# Altium PCB PCB_Filter.PcbDoc
Units mm, origin at the board's own origin, x right, y up, seen from the top; angles counter-clockwise.
Board outline 73.15 x 74.3 mm, 2 copper layers (Top Layer, Bottom Layer), stack 1.1 mm thick; 29 components, 36 nets, 113 pads, 3 vias.
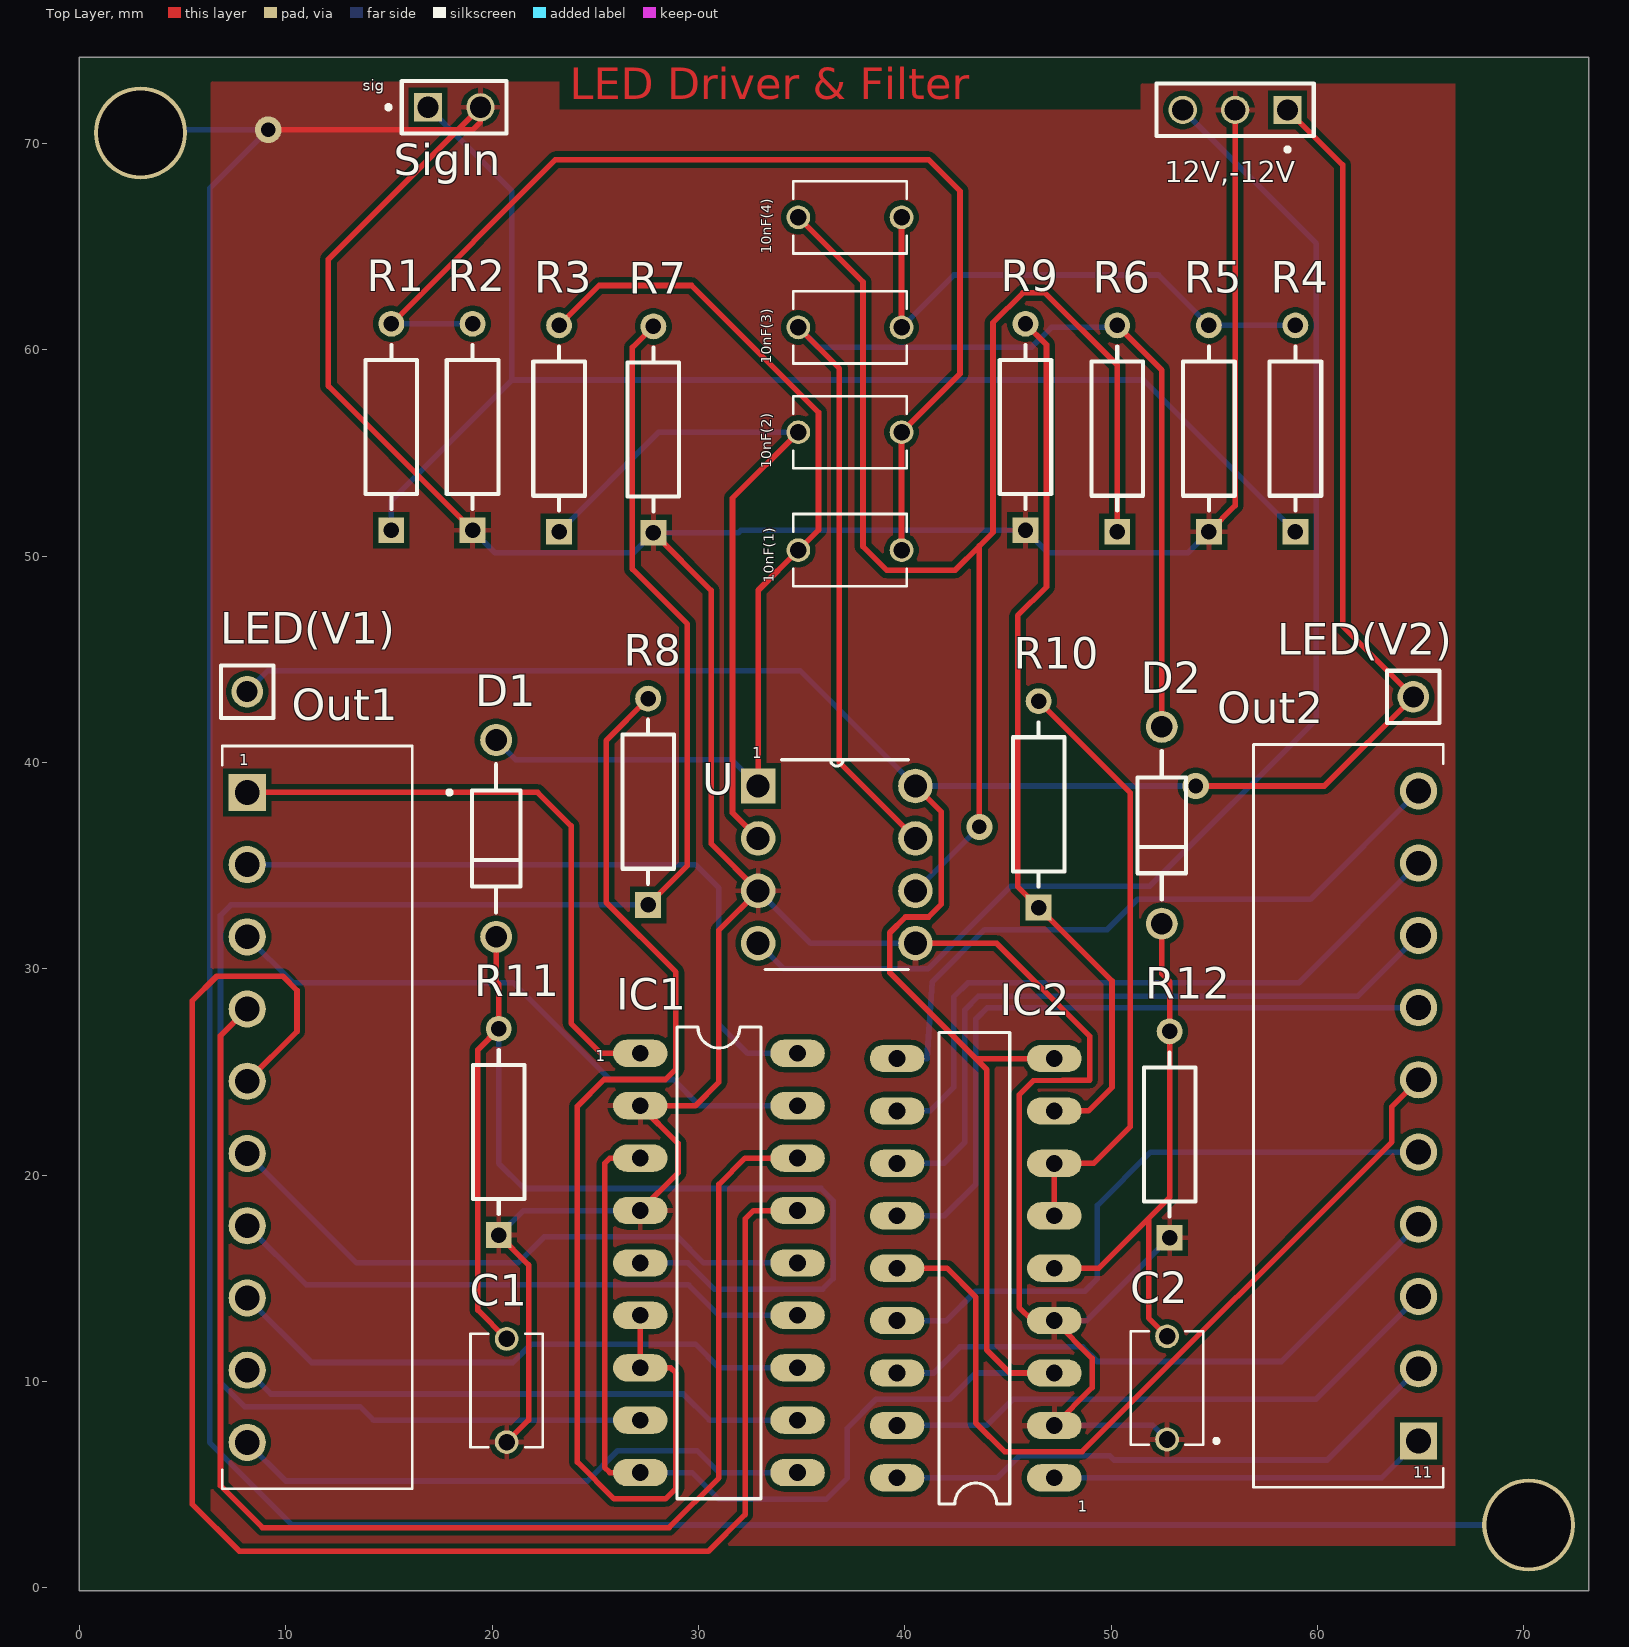
[diagram p0: Top Layer view]
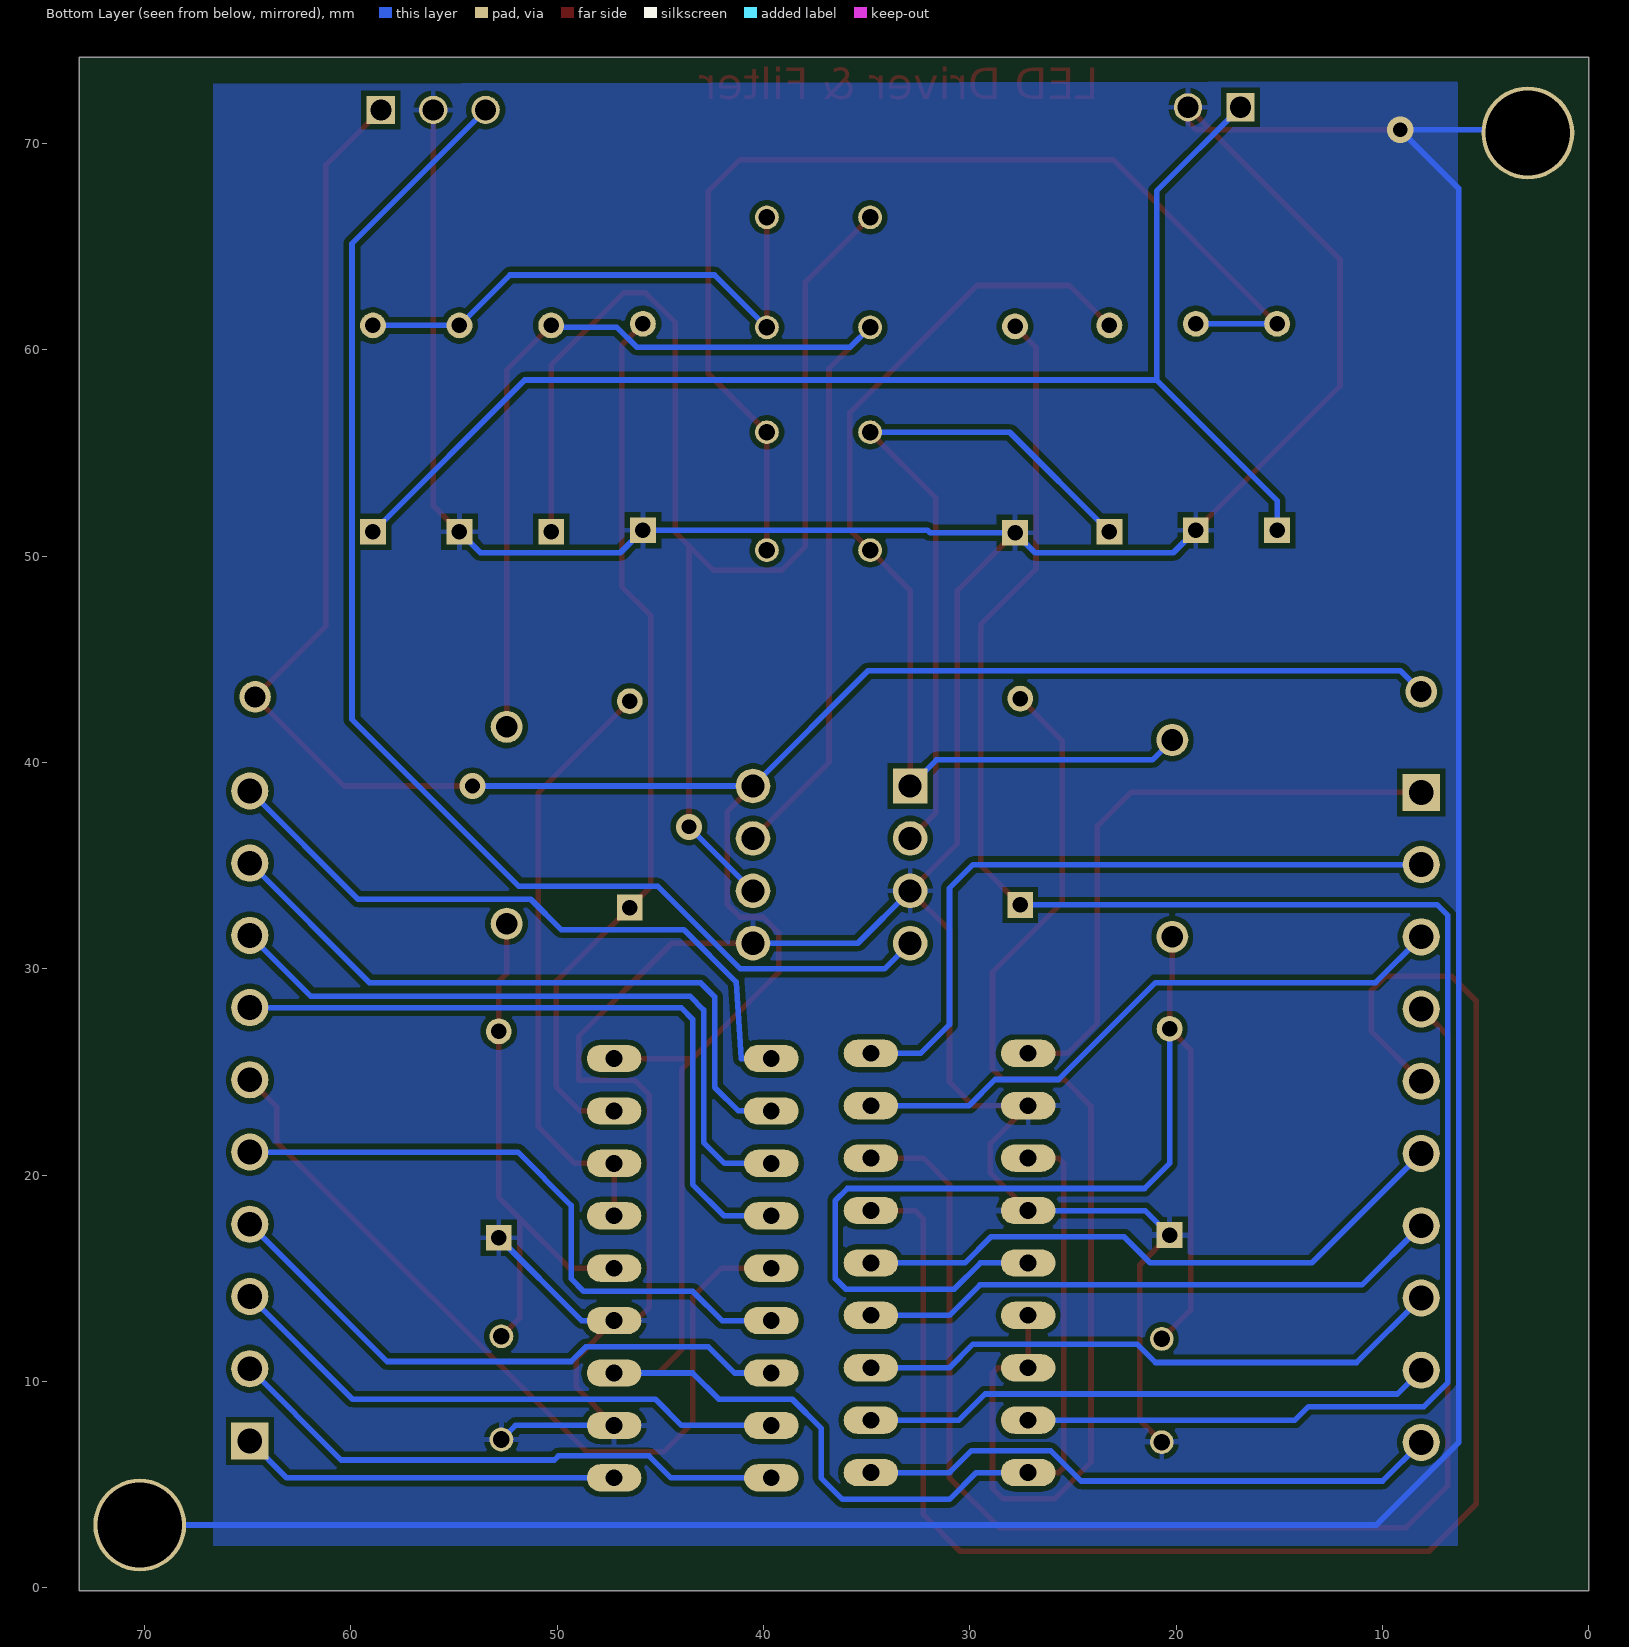
[diagram p1: Bottom Layer view, seen from below]
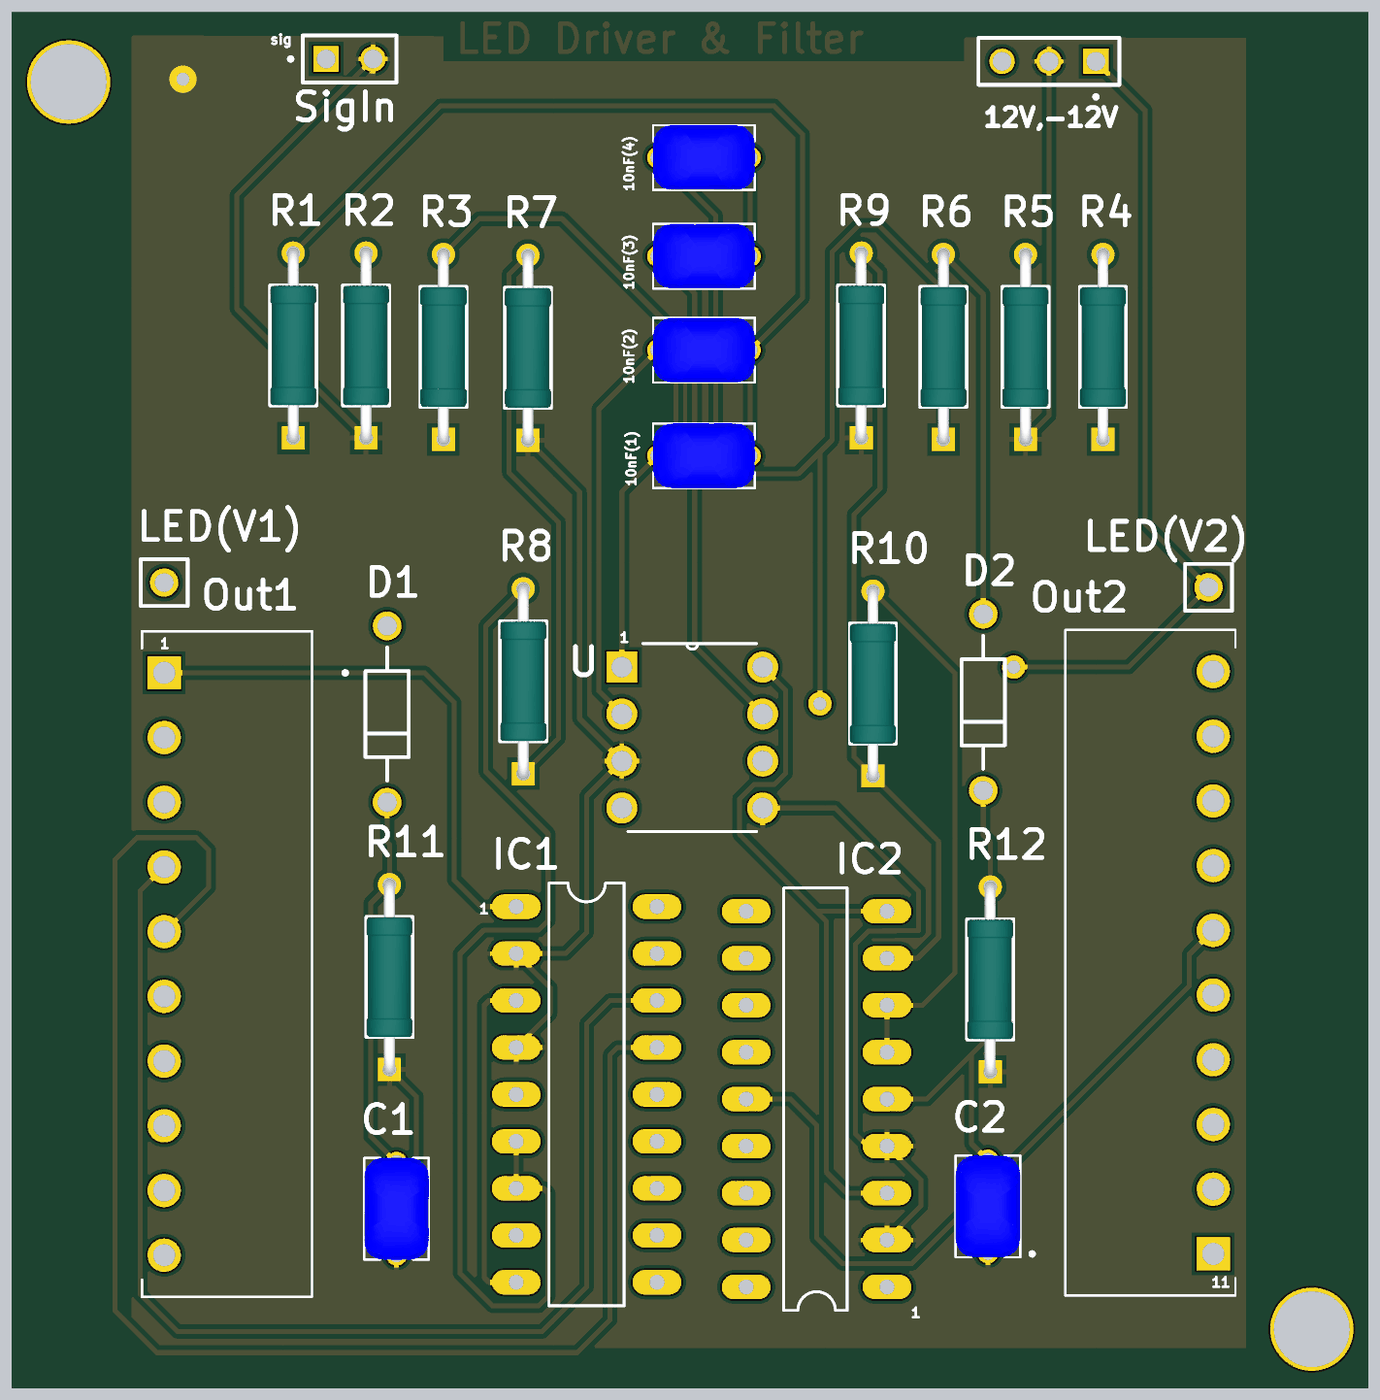
[diagram p2: 3D render of the assembled board from above, using the file's embedded part models]

## Layer stack, top to bottom
Top Solder: solder mask 0.05, SM-001, Dk 4
Top Layer: signal copper 0.1
Dielectric 1: dielectric 0.9, FR-4, Dk 4.8
Bottom Layer: signal copper 0.1
Bottom Solder: solder mask 0.05, SM-001, Dk 4

## Board outline
0,74.168 73.152,74.168 73.152,-0.127 0,-0.127

## Design rules (kind name [scope] priority, off if disabled: settings)
BoardOutlineClearance [All] p1: gap=0.2 ignorepadtopadclearanceinfootprint=FALSE except(0.4: Arc-SplitBarrior Arc-SplitContinuation Track-SplitBarrior Track-SplitContinuation SMDPad-SplitBarrior SMDPad-SplitContinuation THPad-SplitBarrior THPad-SplitContinuation Via-SplitBarrior Via-SplitContinuation Fill-SplitBarrior Fill-SplitContinuation Poly-SplitBarrior Poly-SplitContinuation Region-SplitBarrior Region-SplitContinuation Text-SplitBarrior Text-SplitContinuation)
Clearance "Clearance Bottom Layer" [OnLayer('Bottom Layer')] p1: gap=0.203 ignorepadtopadclearanceinfootprint=TRUE except(0.254: Arc-Text Track-Text SMDPad-Text THPad-Text Via-Text Fill-Text Poly-Text Region-Text Text-Text)
Clearance "Clearance Top Layer" [OnLayer('Top Layer')] p2: gap=0.203 ignorepadtopadclearanceinfootprint=TRUE except(0.254: Arc-Text Track-Text SMDPad-Text THPad-Text Via-Text Fill-Text Poly-Text Region-Text Text-Text)
Clearance [All] p3: gap=0.2 ignorepadtopadclearanceinfootprint=FALSE except(0.089: Arc-Arc Arc-Track Arc-SMDPad Track-Track Track-SMDPad SMDPad-SMDPad; 0.127: Arc-Via Track-Via SMDPad-Via THPad-Via Via-Via; 0.254: Arc-Text Track-Text SMDPad-Text THPad-Text Via-Text Fill-Text Poly-Text Region-Text Text-Text)
HoleSize [All] p1: absolutevalues=TRUE maxlimit=6.3 minlimit=0.2 maxpercent=80.000 minpercent=20.000
MinimumAnnularRing [All] p1: minimumring=0.076
MinimumSolderMaskSliver [All] p1: minsoldermaskwidth=0.1
PolygonConnect PolygonConnect_1 [All] p1: thpad.connectstyle=Relief thpad.reliefconductorwidth=0.508 thpad.reliefentries=4 thpad.polygonreliefangle="90 Angle" thpad.airgapwidth=0.254 smdpad.connectstyle=Relief smdpad.reliefconductorwidth=0.508 smdpad.reliefentries=4 smdpad.polygonreliefangle="90 Angle" smdpad.airgapwidth=0.254 via.connectstyle=Direct via.reliefconductorwidth=0.508 via.reliefentries=4 via.polygonreliefangle="90 Angle" via.airgapwidth=0.254
RoutingCorners [All] p1: cornerstyle=Round minsetback=2.54 maxsetback=2.54
RoutingVias [All] p1: holewidth=0.5 width=1 viastyle="Through Hole" minholewidth=0.2 minwidth=0.45 maxholewidth=1 maxwidth=2
SilkToSilkClearance [All] p1: silktosilkclearance=0.1
SilkToSolderMaskClearance [IsPad] p1: minsilkscreentomaskgap=0.1 clearancetoexposedcopper=TRUE
SolderMaskExpansion [All] p1: expansion=0.102 istentingtop=FALSE
Width [All] p1: maxlimit=2.54 minlimit=0.089 preferedwidth=0.381
25 further rules are at their usual default settings.

## Classes and differential pairs
component class Sheet1(Filter): 10nF(1) 10nF(2) 10nF(3) 10nF(4) 12V,-12V IC1 IC2 LED(V1) LED(V2) Out1 Out2 R1 R2 R3 R4 R5 R6 R7 R8 R9 R10 SigIn U

## Components (designator, comment, footprint, x,y, rotation, side; value= is the part's Value field where it differs from the comment)
10nF(1) "FG26X7R2E104KNT06" CAPRB500W50L550T350H600 37.338,50.292 r180 top
10nF(2) "FG26X7R2E104KNT06" CAPRB500W50L550T350H600 37.338,56.007 r180 top
10nF(3) "FG26X7R2E104KNT06" CAPRB500W50L550T350H600 37.338,61.087 r180 top
10nF(4) "FG26X7R2E104KNT06" CAPRB500W50L550T350H600 37.338,66.421 r180 top
12V,-12V "TSW-101-26-L-T" SAMTEC_TSW-101-26-L-T 58.547,71.628 r90 top
C1 "FG26X7R2E104KNT06" CAPRB500W50L550T350H600 20.701,9.565 r90 top
C2 "FG26X7R2E104KNT06" CAPRB500W50L550T350H600 52.705,9.692 r90 top
D1 "1N4004" ONSC-AXIAL_LEAD-2-59-10_P 20.193,36.322 r90 top
D2 "1N4004" ONSC-AXIAL_LEAD-2-59-10_P 52.451,36.957 r90 top
IC1 "LM3914N" DIL18 30.988,15.748 r270 top
IC2 "LM3914N" DIL18 43.434,15.494 r90 top
LED(V1) "MTSW-101-22-T-S-395" SAMTEC_MTSW-101-22-T-S-395 8.128,43.434 r90 top
LED(V2) "MTSW-101-22-T-S-395" SAMTEC_MTSW-101-22-T-S-395 64.643,43.18 r90 top
Out1 "1-284512-0" TE_1-284512-0 8.128,22.802 r270 top
Out2 "1-284512-0" TE_1-284512-0 64.897,22.873 r90 top
R1 "MRS25000C1001FCT00" FP-MRS25-MFG 15.113,56.261 r90 top
R2 "MRS25000C1001FCT00" FP-MRS25-MFG 19.05,56.261 r90 top
R3 "MRS25000C1001FCT00" FP-MRS25-MFG 23.241,56.181 r90 top
R4 "MRS25000C1001FCT00" FP-MRS25-MFG 58.928,56.181 r90 top
R5 "MRS25000C1001FCT00" FP-MRS25-MFG 54.737,56.181 r90 top
R6 "MRS25000C1001FCT00" FP-MRS25-MFG 50.292,56.181 r90 top
R7 "MRS25000C1001FCT00" FP-MRS25-MFG 27.813,56.134 r90 top
R8 "MRS25000C1001FCT00" FP-MRS25-MFG 27.559,38.1 r90 top
R9 "MRS25000C1001FCT00" FP-MRS25-MFG 45.847,56.261 r90 top
R10 "MRS25000C1001FCT00" FP-MRS25-MFG 46.482,37.973 r90 top
R11 "MRS25000C1001FCT00" FP-MRS25-MFG 20.32,22.098 r90 top
R12 "MRS25000C1001FCT00" FP-MRS25-MFG 52.832,21.971 r90 top
SigIn "HW-02-08-F-S-330-080" SAMTEC_HW-02-08-F-S-330-080 16.891,71.755 r0 top
U "TL072CN" DIP254P762X533-8 40.513,31.242 r0 top

## Footprints (in the part's own frame and the unit in brackets; to place one, negate y for a bottom-side part, rotate by r counter-clockwise, add the part's x,y. Pads: shape width x height; smd on the part's side, far side on the other; paste and mask are expansions set on the pad)
CAPRB500W50L550T350H600 [mm]
  round 1.15 hole 0.8: 1(-2.5,0) 2(2.5,0)
  silkscreen extent -2.75,-1.75 2.75,1.75, body extent -2.75,-1.75 2.75,1.75, height 3
DIL18 [mil]
  oval 52x104 hole 32: 1(-400,-150) 2(-300,-150) 3(-200,-150) 4(-100,-150) 5(0,-150) 6(100,-150) 7(200,-150) 8(300,-150) 9(400,-150) 10(400,150) 11(300,150) 12(200,150) 13(100,150) 14(0,150) 15(-100,150) 16(-200,150) 17(-300,150) 18(-400,150)
  silkscreen extent -450,-80 450,80
DIP254P762X533-8 [mil]
  rect 66x66 hole 44: 1(-300,300)
  round 66 hole 44: 2(-300,200) 3(-300,100) 4(-300,0) 5(0,0) 6(0,100) 7(0,200) 8(0,300)
  silkscreen extent -287,-50 -13,350
FP-MRS25-MFG [mm]
  rect 1.25x1.25 hole 0.75 paste-2539.97 mask+0: 1(-5,0)
  round 1.25 hole 0.75 paste-2539.97 mask+0: 2(5,0)
  silkscreen extent -3.97,-1.25 3.97,1.25, body extent -5.72,-1.35 5.72,1.35, height 0.25
ONSC-AXIAL_LEAD-2-59-10_P [mm] "AXIAL, 2-Leads, Diameter 2.35mm"
  round 1.55 hole 1.05: 1(-4.77,0) 2(4.77,0)
  silkscreen extent -3.6,-1.18 3.6,1.18
SAMTEC_HW-02-08-F-S-330-080 [mm]
  rect 1.37x1.37 hole 1.02: 01(0,0)
  round 1.37 hole 1.02: 02(2.54,0)
  silkscreen extent -2.02,-1.27 3.81,1.27
SAMTEC_MTSW-101-22-T-S-395 [mm]
  round 1.53 hole 1.02: 01(0,0)
  silkscreen extent -1.27,-1.27 1.27,1.27
SAMTEC_TSW-101-26-L-T [mm]
  rect 1.37x1.37 hole 1.02: 01(0,0)
  round 1.37 hole 1.02: 02(0,2.54) 03(0,5.08)
  silkscreen extent -2.02,-1.27 1.27,6.35
TE_1-284512-0 [mm]
  rect 1.8x1.8 hole 1.2: 1(-15.75,0)
  round 1.8 hole 1.2: 2(-12.25,0) 3(-8.75,0) 4(-5.25,0) 5(-1.75,0) 6(1.75,0) 7(5.25,0) 8(8.75,0) 9(12.25,0) 10(15.75,0)
  silkscreen extent -18,-1.2 18,9.9

## Part data
10nF(1) 10nF(2) 10nF(3) 10nF(4) C1 C2: "0.1ÂµF Â±10% 250V Ceramic Capacitor X7R Radial", Package="Radial TDK", Availability="In Stock", Check_prices=https://www.snapeda.com/parts/FG26X7R2E104KNT06/TDK/view-part/?ref=eda, MF=TDK, MP=FG26X7R2E104KNT06, Price=None, Purchase-URL=https://pricing.snapeda.com/search/part/FG26X7R2E104KNT06/?ref=eda, SnapEDA_Link=https://www.snapeda.com/parts/FG26X7R2E104KNT06/TDK/view-part/?ref=snap
12V,-12V SigIn: Package=None, Availability=Unavailable, Price=None
  12V,-12V: MP=TSW-101-26-L-T
  SigIn: MP=HW-02-08-F-S-330-080
D1 D2: library part CMP-0902-00115-1, "Standard Recovery Rectifier, 2-Pin Axial_Lead, Pb-Free, Bulk Bag", Manufacturer="On Semiconductor", ComponentLink1Description="Manufacturer URL", ComponentLink1URL=http://www.onsemi.com/, ComponentLink2Description=Datasheet, ComponentLink2URL=http://www.onsemi.com/pub_link/Collateral/1N4001-D.PDF, ComponentLink3Description="Package Specification", ComponentLink3URL=http://www.onsemi.cn/pub_link/Collateral/59-10.PDF, DatasheetVersion="Rev. 13", IFSM Max (A)=30, IO(rec) Max (A)=1, Mounting Technology="Through Hole", PackageDescription="2-Pin, Axial Lead, Diameter 2.35 mm", PackageReference=AXIAL_LEAD-2-59-10, PackageVersion="Rev. U, 02/2005", Packing="Bulk Bag", PartNumber=1N4004, RoHS=TRUE, Type="Standard Recovery", VRRM Max (V)=400
IC1 IC2: "LED Lighting Drivers", Package=None, Availability=Unavailable, MF="Texas Instruments", MP=LM3914N, Price=None, SnapEDA_Link=https://www.snapeda.com/parts/LM3914N/Texas%20Instruments/view-part/4652973/?ref=snap
LED(V1) LED(V2): "Connector Header Through Hole 1 position", Package=None, Availability="In Stock", Check_prices=https://www.snapeda.com/parts/MTSW-101-22-T-S-395/Samtec/view-part/?ref=eda, MF=Samtec, MP=MTSW-101-22-T-S-395, Price=None, Purchase-URL=https://pricing.snapeda.com/search/part/MTSW-101-22-T-S-395/?ref=eda, SnapEDA_Link=https://www.snapeda.com/parts/MTSW-101-22-T-S-395/Samtec/view-part/?ref=snap
Out1 Out2: "10 POS TERMI-BLOK HDR 900 POLA", Package=None, Availability=Unavailable, Centerline_Pitch="3.5 mm[.138 in]", EU_RoHS_Compliance=Compliant, MF="TE Connectivity", MP=1-284512-0, Number_of_Positions=10, Price=None, SnapEDA_Link=https://www.snapeda.com/parts/1-284512-0/TE%20Connectivity%20AMP%20Connectors/view-part/2366032/?ref=snap, TE_purchase_URL=https://www.te.com/usa-en/product-1-284512-0.html?te_bu=Cor&te_type=disp&te_campaign=seda_glo_cor-seda-global-disp-prtnr-fy19-seda-model-bom-cta_sma-317_1&elqCampaignId=32493
R1 R2 R3 R4 R5 R6 R7 R8 R9 R10 R11 R12: library part CMP-02408-000051-1, "RES 1K OHM 0.6W 1% AXIAL", Case/Package=Axial, Max Operating Temperature=155°C, Max Power Dissipation=600mW, Min Operating Temperature=-55°C, Package Quantity=5000, Resistance=1kR, Resistance Tolerance=1%, Resistor Type="Metal Film", Temperature Coefficient=50ppm/°C, Voltage Rating=350V, Construction=Cylindrical, Contact Plating=Tin, Diameter=2.5mm, Lead Diameter=0.6mm, Lead Free="Lead Free", Length=6.5mm, Military Standard=Not, Mount="Through Hole", Number of Pins=2, Number of Terminations=2, Packaging="Tape and Reel", Power Rating=600mW, Radiation Hardening=No, RoHS Compliant=Yes, Series=MRS25, Technology="THIN FILM", Termination=Axial, Tolerance=1%, Voltage Rating (DC)=350V, Weight=0.00776oz, Width=2.5mm
U: "J-FET Amplifier 2 Circuit 8-DIP", Package="DIP-8 Texas Instruments", Availability=Unavailable, MF="Texas Instruments", MP=TL072CN, Price=None, SnapEDA_Link=https://www.snapeda.com/parts/TL072CN/Texas%20Instruments/view-part/576842/?ref=snap

## Free pads (board coordinates)
  round 4.5 hole 4.1: 4(2.959,70.51) 6(70.231,3.048)

## Via types
v1: diameter 1.27, hole 0.711, Top Layer to Bottom Layer, 3 vias

## Nets (pads, with @x,y where several pads share a name; then routed paths per layer and width w, separated by ;. In a path a pad name is that pad's centre, name@x,y a point inside that pad or via, vN(x,y) a via of type N, cw(c..) or ccw(c..) an arc to the next point about the centre after c; other vN are vias at no path point)
1: IC1.1 Out1.1 | length 29.9
  Top Layer w0.27: Out1.1 22.205,38.552 23.825,36.932 23.825,27.356 25.273,25.908 IC1.1
2: IC1.18 Out1.2 | length 34.3
  Bottom Layer w0.27: Out1.2 29.845,35.052 30.988,33.909 30.988,27.305 32.385,25.908 IC1.18
3: IC1.17 Out1.3 | length 30.1
  Bottom Layer w0.27: Out1.3 10.343,29.337 21.006,29.337 25.705,24.638 28.778,24.638 30.048,23.368 IC1.17
4: IC1.16 Out1.4 | length 68.2
  Top Layer w0.27: Out1.4 6.833,26.757 6.833,4.953 8.865,2.921 28.575,2.921 30.988,5.334 30.988,19.558 32.258,20.828 IC1.16
5: IC1.15 Out1.5 | length 81.2
  Top Layer w0.27: Out1.5 10.541,26.965 10.541,28.956 9.856,29.641 6.654,29.641 5.461,28.448 5.461,4.064 7.747,1.778 30.48,1.778 32.258,3.556 32.258,17.882 32.664,18.288 IC1.15
6: IC1.14 Out1.6 | length 29.9
  Bottom Layer w0.27: Out1.6 13.432,15.748 21.26,15.748 22.53,17.018 28.972,17.018 30.242,15.748 IC1.14
7: IC1.13 Out1.7 | length 28.5
  Bottom Layer w0.27: Out1.7 10.999,14.681 29.515,14.681 30.988,13.208 IC1.13
8: IC1.12 Out1.8 | length 28.8
  Bottom Layer w0.27: Out1.8 11.258,10.922 21.006,10.922 21.895,11.811 29.845,11.811 30.988,10.668 IC1.12
9: IC1.11 Out1.9 | length 27.7
  Bottom Layer w0.27: Out1.9 9.282,9.398 29.261,9.398 30.531,8.128 IC1.11
10: IC1.10 Out1.10 | length 28.5
  Bottom Layer w0.27: Out1.10 9.998,5.182 24.613,5.182 26.086,6.655 29.921,6.655 30.988,5.588 IC1.10
11: IC2.1 Out2.1 | length 18.4
  Bottom Layer w0.27: IC2.1 63.108,5.334 Out2.1
12: IC2.18 Out2.2 | length 27.6
  Bottom Layer w0.27: IC2.18 44.475,5.334 45.542,6.401 49.936,6.401 50.14,6.198 60.472,6.198 Out2.2
13: IC2.17 Out2.3 | length 27.9
  Bottom Layer w0.27: IC2.17 43.967,7.874 45.237,9.144 59.918,9.144 Out2.3
14: IC2.16 Out2.4 | length 28.8
  Bottom Layer w0.27: IC2.16 41.402,10.414 42.672,11.684 48.616,11.684 49.327,10.973 58.247,10.973 Out2.4
15: IC2.15 Out2.5 | length 30.7
  Bottom Layer w0.27: IC2.15 42.012,12.954 43.434,14.376 48.717,14.376 49.327,14.986 49.327,18.542 51.908,21.123 Out2.5
16: IC2.14 Out2.6 | length 41
  Top Layer w0.27: IC2.14 42.037,15.494 43.434,14.097 43.434,8.001 44.831,6.604 48.59,6.604 63.602,21.615 63.602,23.328 Out2.6
17: IC2.13 Out2.7 | length 34.1
  Bottom Layer w0.27: IC2.13 41.91,18.034 43.434,19.558 43.434,27.559 43.998,28.123 Out2.7
18: IC2.12 Out2.8 | length 33.6
  Bottom Layer w0.27: IC2.12 41.885,20.574 42.901,21.59 42.901,28.016 43.561,28.677 61.951,28.677 Out2.8
19: IC2.11 Out2.9 | length 32.8
  Bottom Layer w0.27: IC2.11 41.224,23.114 42.367,24.257 42.367,28.641 43.053,29.327 59.101,29.327 Out2.9
20: IC2.10 Out2.10 | length 32.6
  Bottom Layer w0.27: IC2.10 41.072,25.654 41.326,29.362 43.866,31.902 49.809,31.902 51.283,33.376 59.65,33.376 Out2.10
GND: 12V,-12V.02 C1.1 C2.1 IC1.2 IC1.4 IC2.2 IC2.4 pad.4 pad.6 R2.1 R5.1 R7.1 R9.1 R11.1 R12.1 SigIn.02 U.3 U.5 | length 348.1
  Top Layer w0.27: v1(9.144,70.663) 19.05,70.663 19.431,71.044 SigIn.02 12.065,64.389 12.065,58.246 R2.1 ; R11.1 21.768,15.65 21.768,8.132 C1.1 ; IC1.4 29.007,20.117 29.007,21.539 IC1.2 29.845,23.368 30.988,24.511 30.988,31.877 U.3 30.607,36.068 30.607,48.34 R7.1 ; U.5 44.45,31.242 48.954,26.738 48.954,24.613 46.228,24.587 45.534,23.893 45.534,13.597 46.177,12.954 IC2.4 49.073,11.125 49.073,9.703 IC2.2 ; R5.1 56.007,52.451 56.007,71.628
  Bottom Layer w0.27: pad.4 3.186,70.51 3.478,70.663 v1(9.144,70.663) 6.309,67.827 6.309,7.048 10.309,3.048 pad.6 ; R2.1 20.146,50.165 26.844,50.165 R7.1 31.928,51.134 32.055,51.261 R9.1 46.943,50.165 53.721,50.165 R5.1 ; R11.1 21.51,18.288 IC1.4 ; U.3 35.433,31.242 U.5 ; IC2.2 52.023,7.874 C2.1 ; IC2.4 48.815,12.954 R12.1
Net10nF(1)_1: 10nF(1).1 10nF(2).1 R1.2 R2.2 | length 54
  Top Layer w0.27: R1.2 23.067,69.215 41.148,69.215 42.672,67.691 42.672,58.841 39.838,56.007 39.838,50.292
  Bottom Layer w0.27: R1.2 R2.2
Net10nF(2)_2: 10nF(2).2 R3.1 U.2 | length 35.1
  Top Layer w0.27: U.2 31.648,37.567 31.648,52.817 34.838,56.007
  Bottom Layer w0.27: R3.1 28.067,56.007 34.838,56.007
Net10nF(3)_1: 10nF(3).1 10nF(4).1 R4.2 R5.2 | length 26.5
  Top Layer w0.27: 39.838,61.087 39.838,66.421
  Bottom Layer w0.27: 39.838,61.087 42.378,63.627 52.291,63.627 R5.2 R4.2
Net10nF(4)_2: 10nF(4).2 R6.1 U.6 | length 69.1
  Top Layer w0.27: 34.838,66.421 37.973,63.286 37.973,50.47 39.116,49.327 42.443,49.327 43.612,50.495 ; v1(43.612,36.881) 43.612,50.495 ; R6.1 50.292,59.258 46.787,62.763 45.72,62.763 44.272,61.316 44.272,51.156 43.612,50.495
  Bottom Layer w0.27: U.6 v1(43.612,36.881)
NetC1_2: C1.2 D1.1 IC1.5 R11.2 | length 57.9
  Top Layer w0.27: D1.1 20.193,29.388 20.32,29.261 R11.2 19.304,26.082 19.304,13.462 C1.2
  Bottom Layer w0.27: R11.2 20.32,20.574 21.539,19.355 35.941,19.355 36.525,18.771 36.525,14.986 36.017,14.478 30.759,14.478 29.489,15.748 IC1.5
NetC2_2: C2.2 D2.1 IC2.5 R12.2 | length 26.5
  Top Layer w0.27: IC2.5 49.403,15.494 51.816,17.907 ; D2.1 52.451,29.769 52.832,29.388 R12.2 52.832,18.923 51.816,17.907 ; C2.2 51.816,13.081 51.816,17.907
NetIC1_6: IC1.6 IC1.7 R8.2 | length 58.6
  Top Layer w0.27: IC1.6 IC1.7 28.651,10.668 28.905,10.414 28.905,4.826 28.397,4.318 25.908,4.318 24.13,6.096 24.13,23.343 25.425,24.638 28.397,24.638 28.905,25.146 28.905,29.845 25.527,33.223 25.527,41.068 R8.2
NetIC1_8: IC1.8 R7.2 R8.1 | length 95
  Top Layer w0.27: R8.1 29.464,35.005 29.464,46.711 26.797,49.378 26.797,60.118 R7.2
  Bottom Layer w0.27: IC1.8 14.249,8.128 13.589,8.788 8.001,8.788 6.833,9.957 6.833,32.588 7.344,33.1 R8.1
NetIC2_6: IC2.6 IC2.7 R10.2 | length 29.4
  Top Layer w0.27: R10.2 50.927,38.528 50.927,22.352 49.149,20.574 IC2.7 IC2.6
NetIC2_8: IC2.8 R9.2 R10.1 | length 43.2
  Top Layer w0.27: R9.2 46.863,60.245 46.863,48.514 45.466,47.117 45.466,33.989 R10.1 50.038,29.417 50.038,24.257 48.895,23.114 IC2.8
Out1: 10nF(1).2 D1.2 R3.2 U.1 | length 48.9
  Top Layer w0.27: R3.2 25.179,63.119 29.667,63.119 35.814,56.972 35.814,51.268 34.838,50.292 32.893,48.347 U.1
  Bottom Layer w0.27: D1.2 21.153,40.132 31.623,40.132 U.1
Out2: 10nF(3).2 D2.2 R6.2 U.7 | length 63.8
  Top Layer w0.27: 34.838,61.087 36.83,59.095 36.83,40.005 U.7 ; R6.2 52.451,59.022 D2.2
  Bottom Layer w0.27: 34.838,61.087 35.802,60.123 46.143,60.123 47.107,61.087 50.198,61.087 R6.2
SigIn: R1.1 R4.1 SigIn.01 | length 65.6
  Bottom Layer w0.27: R1.1 15.113,52.694 20.955,58.536 ; SigIn.01 20.955,67.691 20.955,58.536 ; R4.1 51.573,58.536 20.955,58.536
V+: 12V,-12V.01 IC1.3 IC1.9 IC2.3 IC2.9 LED(V1).01 LED(V2).01 U.8 | length 174
  Top Layer w0.27: IC1.9 25.705,5.588 25.451,5.842 25.451,20.574 25.705,20.828 IC1.3 ; U.8 41.758,37.617 41.758,33.122 41.148,32.512 40.03,32.512 39.268,31.75 39.268,29.82 43.434,25.654 ; IC2.3 45.085,10.414 43.967,11.532 43.967,25.121 43.434,25.654 ; IC2.9 43.434,25.654 ; v1(54.102,38.862) 60.325,38.862 64.643,43.18 61.214,46.609 61.214,68.961 58.547,71.628
  Bottom Layer w0.27: 8.128,43.434 9.144,44.45 34.925,44.45 U.8 v1(54.102,38.862) ; IC1.9 29.693,5.588 30.988,4.293 36.17,4.293 37.211,5.334 37.211,7.747 38.608,9.144 42.164,9.144 43.434,10.414 IC2.3
V-: 12V,-12V.03 U.4 | length 64.8
  Bottom Layer w0.27: U.4 34.138,29.997 41.123,29.997 45.136,34.011 51.867,34.011 59.944,42.088 59.944,65.151 53.467,71.628

## Polygon pours and split planes (outlines as drawn)
GND on Bottom Layer "GND_L02_P000" (solid, remove dead copper, pour order 0): 6.35,73.025 6.35,2.032 7.112,2.032 66.675,2.032 66.675,72.898
GND on Top Layer "GND_L01_P001" (solid, remove dead copper, pour order 1): 6.35,73.025 6.35,2.032 66.675,2.032 66.675,72.898

## Other copper
Top Layer:
  text "LED Driver & Filter" at 23.749,72.136 h1.52

## Silkscreen, mask and mechanical layers (free items; w line width, h text height)
Top Overlay:
  text "sig" at 13.716,72.565 h0.52
  text "1" at 32.616,40.208 h0.52
  text "1" at 7.747,39.878 h0.52
  text "1" at 25.019,25.527 h0.52
  text "11" at 64.643,5.334 h0.52
  text "1" at 48.387,3.683 h0.52
Board:
  lines w0.254: 0,0 0,74.168 73.152,74.168 73.152,0 0,0